# Altium PCB MergeRev3_0.PcbDoc
Units mil, origin at the board's own origin, x right, y up, seen from the top; angles counter-clockwise.
Board outline 3250 x 4600 mil, 2 copper layers (Top Layer, Bottom Layer); 11 components, 8 nets, 126 pads, 2 vias.
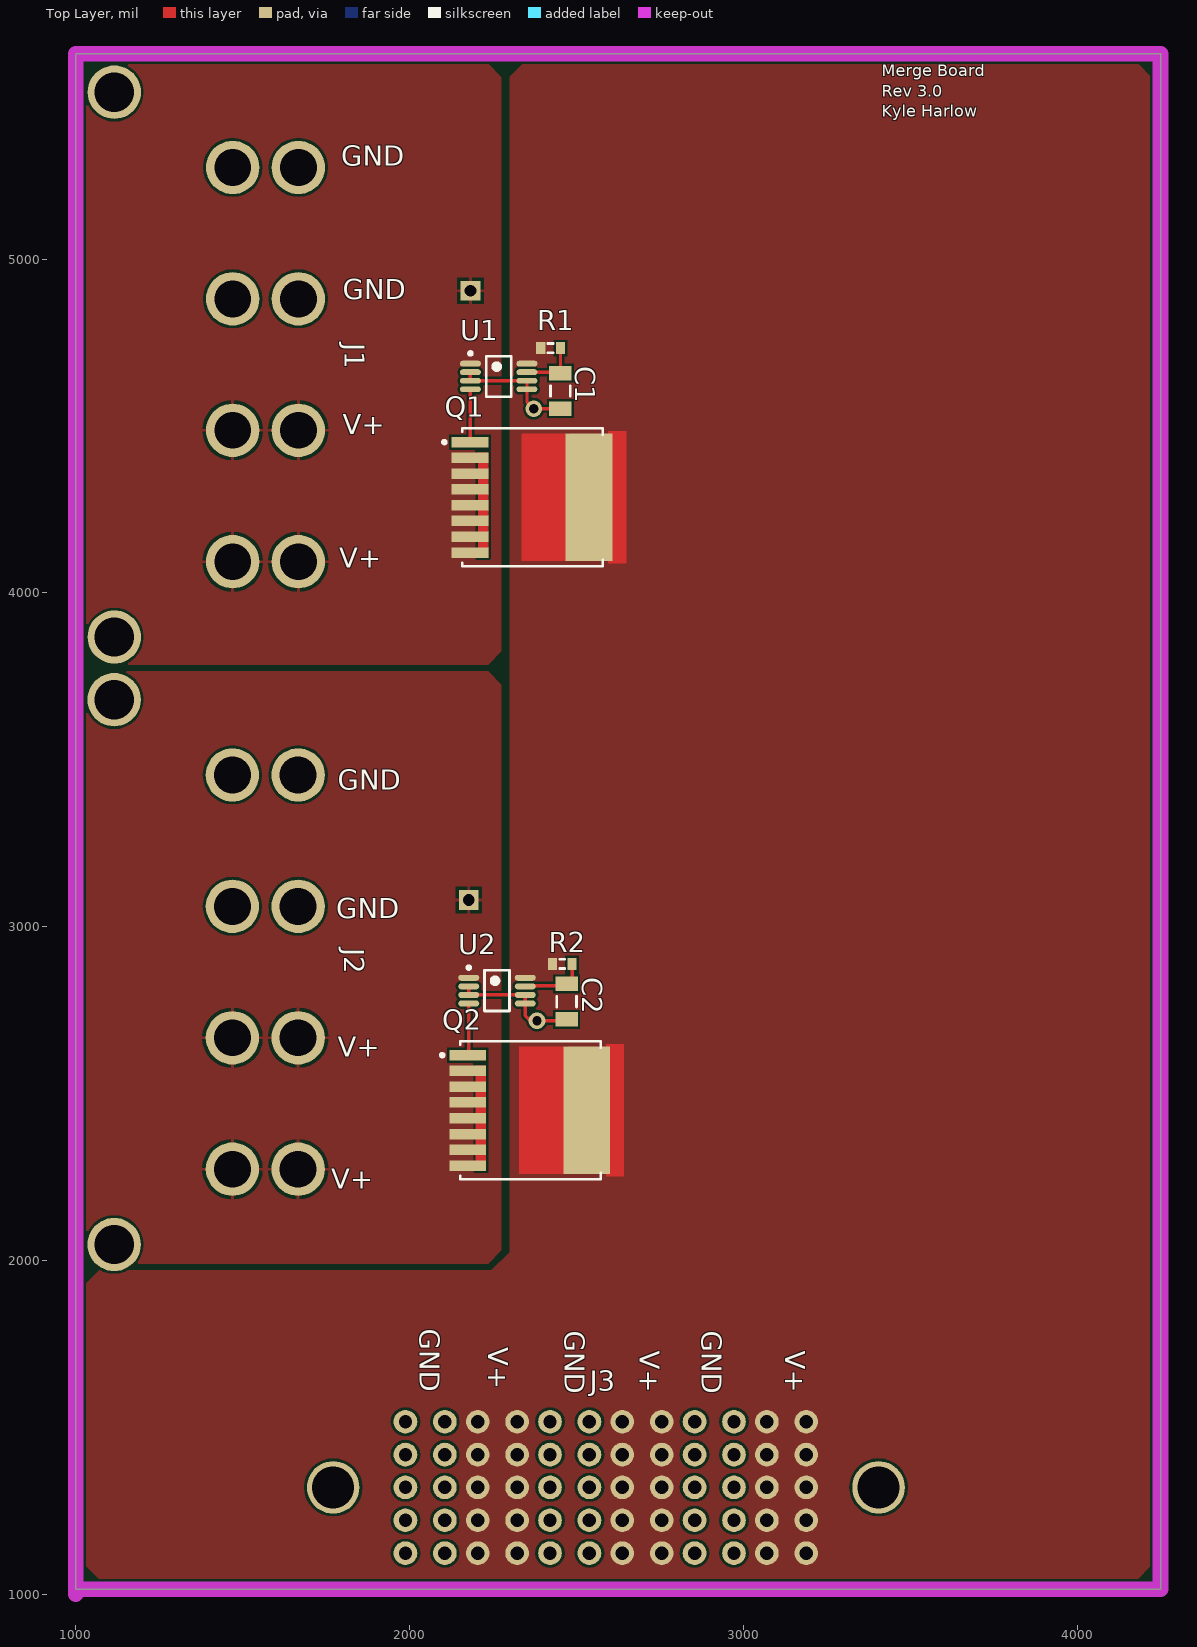
[diagram p0: Top Layer view]
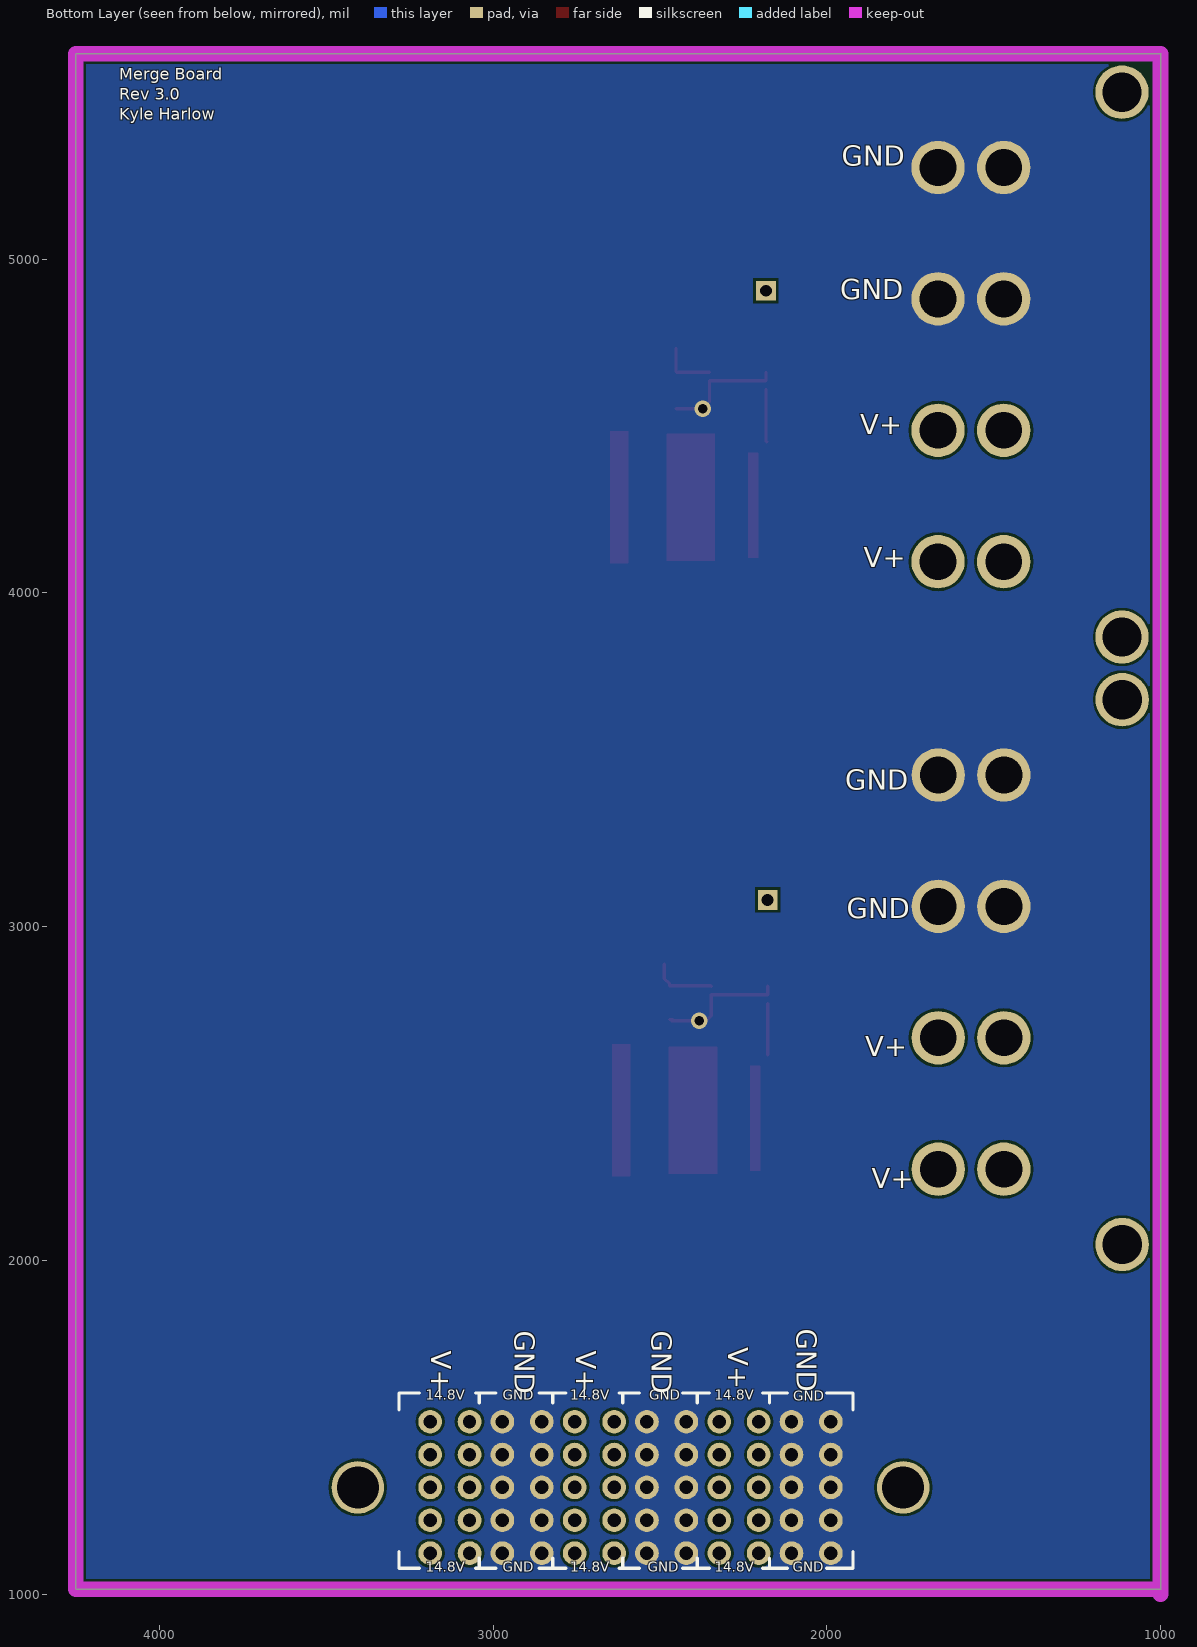
[diagram p1: Bottom Layer view, seen from below]

## Layer stack, top to bottom
Top Solder: solder mask 0.4, Solder Resist, Dk 3.5
Top Layer: signal copper 1.4
Dielectric 1: dielectric 12.6, FR-4, Dk 4.8
Bottom Layer: signal copper 1.4
Bottom Solder: solder mask 0.4, Solder Resist, Dk 3.5

## Board outline
1000,1015 4250,1015 4250,5615 1000,5615

## Design rules (kind name [scope] priority, off if disabled: settings)
Clearance [All] p1: gap=7.87 ignorepadtopadclearanceinfootprint=FALSE
PolygonConnect PolygonConnect_13 [All vs IsNamedPolygon('Top Layer-NetJ1_3')] p1: thpad.connectstyle=Relief thpad.reliefconductorwidth=10 thpad.reliefentries=4 thpad.polygonreliefangle="90 Angle" thpad.airgapwidth=10 smdpad.connectstyle=Direct smdpad.reliefconductorwidth=10 smdpad.reliefentries=4 smdpad.polygonreliefangle="90 Angle" smdpad.airgapwidth=10 via.connectstyle=Relief via.reliefconductorwidth=10 via.reliefentries=4 via.polygonreliefangle="90 Angle" via.airgapwidth=10
PolygonConnect PolygonConnect_12 [All vs IsNamedPolygon('Top Layer-NetJ2_3')] p2: thpad.connectstyle=Relief thpad.reliefconductorwidth=10 thpad.reliefentries=4 thpad.polygonreliefangle="90 Angle" thpad.airgapwidth=10 smdpad.connectstyle=Direct smdpad.reliefconductorwidth=10 smdpad.reliefentries=4 smdpad.polygonreliefangle="90 Angle" smdpad.airgapwidth=10 via.connectstyle=Relief via.reliefconductorwidth=10 via.reliefentries=4 via.polygonreliefangle="90 Angle" via.airgapwidth=10
PolygonConnect PolygonConnect_11 [All vs IsNamedPolygon('Top Layer-NetJ3_1')] p3: thpad.connectstyle=Direct thpad.reliefconductorwidth=10 thpad.reliefentries=4 thpad.polygonreliefangle="90 Angle" thpad.airgapwidth=10 smdpad.connectstyle=Direct smdpad.reliefconductorwidth=10 smdpad.reliefentries=4 smdpad.polygonreliefangle="90 Angle" smdpad.airgapwidth=10 via.connectstyle=Relief via.reliefconductorwidth=10 via.reliefentries=4 via.polygonreliefangle="90 Angle" via.airgapwidth=10
PolygonConnect PolygonConnect_10 [All vs IsNamedPolygon('Top Layer-NetJ3_1')] p4: thpad.connectstyle=Direct thpad.reliefconductorwidth=10 thpad.reliefentries=4 thpad.polygonreliefangle="90 Angle" thpad.airgapwidth=10 smdpad.connectstyle=Relief smdpad.reliefconductorwidth=10 smdpad.reliefentries=4 smdpad.polygonreliefangle="90 Angle" smdpad.airgapwidth=10 via.connectstyle=Relief via.reliefconductorwidth=10 via.reliefentries=4 via.polygonreliefangle="90 Angle" via.airgapwidth=10
PolygonConnect PolygonConnect_9 [All vs IsNamedPolygon('Top Layer-NetJ3_1')] p5: thpad.connectstyle=Direct thpad.reliefconductorwidth=10 thpad.reliefentries=4 thpad.polygonreliefangle="90 Angle" thpad.airgapwidth=10 smdpad.connectstyle=Direct smdpad.reliefconductorwidth=10 smdpad.reliefentries=4 smdpad.polygonreliefangle="90 Angle" smdpad.airgapwidth=10 via.connectstyle=Relief via.reliefconductorwidth=10 via.reliefentries=4 via.polygonreliefangle="90 Angle" via.airgapwidth=10
PolygonConnect PolygonConnect_8 [All vs IsNamedPolygon('Bottom Layer-GND')] p6: connectstyle=Direct reliefconductorwidth=10 reliefentries=4 polygonreliefangle="90 Angle" airgapwidth=10
PolygonConnect PolygonConnect_7 [All vs IsNamedPolygon('Top Layer-NetJ1_3')] p7: connectstyle=Direct reliefconductorwidth=10 reliefentries=4 polygonreliefangle="90 Angle" airgapwidth=10
PolygonConnect PolygonConnect_6 [All vs IsNamedPolygon('Top Layer-NetJ2_3')] p8: connectstyle=Direct reliefconductorwidth=10 reliefentries=4 polygonreliefangle="90 Angle" airgapwidth=10
PolygonConnect PolygonConnect_5 [All vs IsNamedPolygon('Top Layer-NetJ3_1')] p9: thpad.connectstyle=Direct thpad.reliefconductorwidth=10 thpad.reliefentries=4 thpad.polygonreliefangle="90 Angle" thpad.airgapwidth=10 smdpad.connectstyle=Direct smdpad.reliefconductorwidth=10 smdpad.reliefentries=4 smdpad.polygonreliefangle="90 Angle" smdpad.airgapwidth=10 via.connectstyle=Relief via.reliefconductorwidth=10 via.reliefentries=4 via.polygonreliefangle="90 Angle" via.airgapwidth=10
PolygonConnect PolygonConnect_4 [All vs IsNamedPolygon('Top Layer-NetJ3_1')] p10: thpad.connectstyle=Direct thpad.reliefconductorwidth=10 thpad.reliefentries=4 thpad.polygonreliefangle="90 Angle" thpad.airgapwidth=10 smdpad.connectstyle=Direct smdpad.reliefconductorwidth=10 smdpad.reliefentries=4 smdpad.polygonreliefangle="90 Angle" smdpad.airgapwidth=10 via.connectstyle=Relief via.reliefconductorwidth=10 via.reliefentries=4 via.polygonreliefangle="90 Angle" via.airgapwidth=10
PolygonConnect PolygonConnect_3 [All vs IsNamedPolygon('Top Layer-No Net 1')] p11: thpad.connectstyle=Direct thpad.reliefconductorwidth=10 thpad.reliefentries=4 thpad.polygonreliefangle="90 Angle" thpad.airgapwidth=10 smdpad.connectstyle=Direct smdpad.reliefconductorwidth=10 smdpad.reliefentries=4 smdpad.polygonreliefangle="90 Angle" smdpad.airgapwidth=10 via.connectstyle=Relief via.reliefconductorwidth=10 via.reliefentries=4 via.polygonreliefangle="90 Angle" via.airgapwidth=10
PolygonConnect PolygonConnect_2 [All vs IsNamedPolygon('Top Layer-NetJ3_1')] p12: thpad.connectstyle=Direct thpad.reliefconductorwidth=10 thpad.reliefentries=4 thpad.polygonreliefangle="90 Angle" thpad.airgapwidth=10 smdpad.connectstyle=Relief smdpad.reliefconductorwidth=40 smdpad.reliefentries=4 smdpad.polygonreliefangle="90 Angle" smdpad.airgapwidth=10 via.connectstyle=Relief via.reliefconductorwidth=10 via.reliefentries=4 via.polygonreliefangle="90 Angle" via.airgapwidth=10
PolygonConnect PolygonConnect_1 [All vs IsNamedPolygon('Top Layer-NetJ3_1')] p13: thpad.connectstyle=Relief thpad.reliefconductorwidth=40 thpad.reliefentries=4 thpad.polygonreliefangle="90 Angle" thpad.airgapwidth=10 smdpad.connectstyle=Relief smdpad.reliefconductorwidth=40 smdpad.reliefentries=4 smdpad.polygonreliefangle="90 Angle" smdpad.airgapwidth=10 via.connectstyle=Relief via.reliefconductorwidth=10 via.reliefentries=4 via.polygonreliefangle="90 Angle" via.airgapwidth=10
PolygonConnect [All] p14: connectstyle=Relief reliefconductorwidth=10 reliefentries=4 polygonreliefangle="90 Angle" airgapwidth=10
RoutingVias [All] p1: holewidth=28 width=50 viastyle="Through Hole" minholewidth=28 minwidth=50 maxholewidth=28 maxwidth=50
SolderMaskExpansion [All] p1: expansion=4
Width [All] p1: maxlimit=10 minlimit=10 preferedwidth=10
30 further rules are at their usual default settings.

## Components (designator, comment, footprint, x,y, rotation, side; value= is the part's Value field where it differs from the comment)
C1 "Cap Semi" C1206 2451.93,4605.16 r90 top value=1uF
C2 "Cap Semi" C1206 2470.63,2775.16 r90 top value=1uF
J1 "Molex42820-4224" MOLEX42820-4224 1470,5274.41 r270 top
J2 "Molex42820-4224" MOLEX42820-4224 1469.33,3454.41 r270 top
J3 "Molex 46437-1150" "MOLEX 46437-1150" 1987.68,1123.15 r0 top
Q1 "IPT004N03L" INF-PG-HSOF-8-1_V 2387.74,4286.22 r0 top
Q2 "IPT004N03L" INF-PG-HSOF-8-1_V 2381.28,2449.61 r0 top
R1 "Res3" J1-0603 2422.4,4733.31 r180 top value=100Ohm
R2 "Res3" J1-0603 2457.4,2888.31 r180 top value=100Ohm
U1 "LTC4357CMS8#PBF" LT-MS8-8_N 2266.93,4648.31 r0 top
U2 "LTC4357CMS8#PBF" LT-MS8-8_N 2261.93,2808.31 r0 top

## Footprints (in the part's own frame and the unit in brackets; to place one, negate y for a bottom-side part, rotate by r counter-clockwise, add the part's x,y. Pads: shape width x height; smd on the part's side, far side on the other; paste and mask are expansions set on the pad)
C1206 [mm]
  rect 1.1x1.7 smd: 1(-1.35,0) 2(1.35,0)
  silkscreen extent -0.4,-0.75 0.4,0.75, body extent -1.7,-0.9 1.7,0.9, height 1.3
INF-PG-HSOF-8-1_V [mm]
  rect 2.8x0.8 smd: 1(-5.249,4.2) 2(-5.249,3) 3(-5.249,1.8) 4(-5.249,0.6) 5(-5.249,-0.6) 6(-5.249,-1.8) 7(-5.249,-3) 8(-5.249,-4.2)
  rect 3.556x9.703 smd: 9(3.8,0)
  Top Layer region: -1.35,4.85 -1.35,-4.85 2.35,-4.85 2.35,4.85
  Top Layer region: 5.25,5.05 5.25,-5.05 6.65,-5.05 6.65,5.05
  Top Layer region: -4.65,3.4 -4.65,-4.6 -3.85,-4.6 -3.85,3.4
  silkscreen extent -7.32,-5.25 4.85,5.25, body extent -5.84,-4.95 5.84,4.95, height 2.4
J1-0603 [mm]
  rect 0.7x0.9 smd: 1(-0.75,0) 2(0.75,0)
  silkscreen extent -0.2,-0.35 0.2,0.35, body extent -0.85,-0.48 0.85,0.48, height 0.9
LT-MS8-8_N [mm]
  oval 1.6x0.45 smd: 1(-2.15,0.975) 2(-2.15,0.325) 3(-2.15,-0.325) 4(-2.15,-0.975) 5(2.15,-0.975) 6(2.15,-0.325) 7(2.15,0.325) 8(2.15,0.975)
  silkscreen extent -2.27,-1.55 0.95,1.87, body extent -1.55,-1.55 1.55,1.55, height 1.1
MOLEX42820-4224 [mm]
  round 4.064 hole 2.8: 1(0,5) 1(0,0) 2(10,5) 2(10,0) 3(20,0) 3(20,5) 4(30,0) 4(30,5)
  round 4.064 hole 3 unplated: ""(-5.73,-9) ""(35.73,-9)
  body extent -6.92,-22.62 36.9,5.98, height 15
"MOLEX 46437-1150" [mm]
  round 1.8 hole 1.02: 1(0,0) 1(0,2.5) 1(0,5) 1(0,7.5) 1(0,10) 1(3,0) 1(3,2.5) 1(3,5) 1(3,7.5) 1(3,10) 2(5.5,0) 2(5.5,2.5) 2(5.5,5) 2(5.5,7.5) 2(5.5,10) 2(8.5,0) 2(8.5,2.5) 2(8.5,5) 2(8.5,7.5) 2(8.5,10) 3(11,0) 3(11,2.5) 3(11,5) 3(11,7.5) 3(11,10) 3(14,0) 3(14,2.5) 3(14,5) 3(14,7.5) 3(14,10) 4(16.5,0) 4(16.5,2.5) 4(16.5,5) 4(16.5,7.5) 4(16.5,10) 4(19.5,0) 4(19.5,2.5) 4(19.5,5) 4(19.5,7.5) 4(19.5,10) 5(22,0) 5(22,2.5) 5(22,5) 5(22,7.5) 5(22,10) 5(25,0) 5(25,2.5) 5(25,5) 5(25,7.5) 5(25,10) 6(27.5,0) 6(27.5,2.5) 6(27.5,5) 6(27.5,7.5) 6(27.5,10) 6(30.5,0) 6(30.5,2.5) 6(30.5,5) 6(30.5,7.5) 6(30.5,10)
  round 4 hole 3.2 unplated: ""(-5.5,5) ""(36,5)

## Part data
C1 C2: "Capacitor (Semiconductor SIM Model)", LatestRevisionDate=29-May-2009, LatestRevisionNote="IPC-7351 Footprint Added.", PackageDescription="Chip Capacitor", PackageReference=C1206, Published=8-Jun-2000, Publisher="Altium Limited"
J1 J2: Supplier Part Number 1=0428204224-ND, ComponentLink1Description=DataSheet, ComponentLink1URL=https://www.molex.com/pdm_docs/sd/428204224_sd.pdf, Supplier 1=Digi-Key
J3: "5.50mm Pitch EXTreme Ten60Power Right Angle Plug Assembly with Guide Pins, 6 DC Power Circuits", ComponentLink1Description="Molex Website", ComponentLink1URL=https://www.molex.com/molex/products/datasheet.jsp?part=active/0464371150_PCB_HEADERS.xml
Q1 Q2: "N-Channel OptiMOS(TM) Power-MOSFET, 30 V VDS, 300 A ID, -55 to 175 degC, PG-HSOF-8, Reel, Green", Manufacturer=Infineon, Supplier Part Number 1=N/A, ComponentLink1Description="Manufacturer URL", ComponentLink1URL=http://www.infineon.com/, ComponentLink2Description=Datasheet, ComponentLink2URL=http://www.infineon.com/dgdl/IPT004N03L_rev1.2.pdf?folderId=db3a304313b8b5a60113cee8763b02d7&fileId=db3a30433e9d5d11013e9e0f382600c2, ComponentLink3Description="Package Specification", ComponentLink3URL=http://www.infineon.com/cms/packages/SMD_-_Surface_Mounted_Devices/P-PG-HSOF/P-PG-HSOF-08-1.html?__locale=en, DatasheetVersion="Rev. 1.2", Green=TRUE, Halogen-free=TRUE, ID (max)="300 A", IDpuls (max)="1,200 A", Mounting Technology="Surface Mount", PackageDescription="8-Pin Plastic (Green) Heatlink Small Outline Flat Leads Package, 10.375 x 9.9 mm Body, 0.8 mm Pitch", PackageReference=PG-HSOF-8-1, PackageVersion="Rev. 04", Packing=Reel, PartNumber=IPT004N03L, Polarity=FALSE, Ptot (max)="300 W", QG="122 nC", RDS (on) (max)="0.4 mOhm", RthJA (max)="40 K/W", RthJC (max)="0.5 K/W", Supplier 1=Mouser, Technology=OptiMOS(TM), VDS (max)="30 V", VGS(th) (max)="2.2 V", VGS(th) (min)="0.7 V"
R1 R2: "Resistor", LatestRevisionDate=29-May-2009, LatestRevisionNote="IPC-7351 Footprint Added.", PackageDescription="Chip Resistor", PackageReference=J1-0603, Published=8-Jun-2000, Publisher="Altium Limited"
U1 U2: "Positive High Voltage Ideal Diode Controller, 9 to 80 V Vin, 8-pin SOP (MS8-8), 0 to 70 degC, Pb-Free", Manufacturer="Linear Technology", Supplier Part Number 1=LTC4357CMS8#PBF-ND, ComponentLink1Description="Manufacturer URL", ComponentLink1URL=http://www.linear.com/, ComponentLink2Description=Datasheet, ComponentLink2URL=http://cds.linear.com/docs/en/datasheet/4357fd.pdf, ComponentLink3Description="Package Specification", ComponentLink3URL=http://cds.linear.com/docs/en/packaging/05081660_G_MS8.pdf, DatasheetVersion="Rev. D", Ideal Diode="Single, External, N-Channel", Mounting Technology="Surface Mount", PackageDescription="8-Pin Plastic MSOP, Body 3 x 3 mm, Pitch 0.65 mm", PackageReference=MS8-8, PackageVersion="Rev. G, 03/2012", PartNumber=LTC4357CMS8#PBF, RoHS=TRUE, Supplier 1=Digi-Key, Supplier 2=Farnell, Supplier 3=Newark, Supplier Part Number 2=1432779, Supplier Part Number 3=56M9468

## Free pads (board coordinates)
  rect 59.05x59.05 hole 35.43: 10(2177.28,3080) 10(2182.28,4905)

## Via types
v1: diameter 50, hole 28, Top Layer to Bottom Layer, 2 vias

## Nets (pads, with @x,y where several pads share a name; then routed paths per layer and width w, separated by ;. In a path a pad name is that pad's centre, name@x,y a point inside that pad or via, vN(x,y) a via of type N, cw(c..) or ccw(c..) an arc to the next point about the centre after c; other vN are vias at no path point)
GND: C1.1 C2.1 J1.1 J1.2 J2.1 J2.2 J3.1 J3.3 J3.5 U1.2 U1.3 U1.5 U1.6 U2.2 U2.3 U2.5 U2.6 | length 762.9
  Top Layer w10: U2.2 U2.3 U2.6 U2.5 2346.57,2733.66 2361.93,2718.31 v1(2381.93,2718.31) 2464.33,2718.31 2460.63,2722.01 C2.1 ; U1.2 U1.3 U1.6 U1.5 2351.57,4572.36 v1(2371.93,4552.01) C1.1
NetC1_2: C1.2 R1.1 U1.7 | length 170.9
  Top Layer w10: U1.7 2449.13,4661.1 2451.93,4663.9 R1.1
NetC2_2: C2.2 R2.1 U2.7 | length 197
  Top Layer w10: U2.7 2348.31,2822.83 2470.63,2822.83 C2.2 2486.93,2844.61 R2.1
NetJ1_3: J1.3 J1.4 pad.10@2182.28,4905 Q1.2 Q1.3 Q1.4 Q1.5 Q1.6 Q1.7 Q1.8 U1.1
NetJ2_3: J2.3 J2.4 pad.10@2177.28,3080 Q2.2 Q2.3 Q2.4 Q2.5 Q2.6 Q2.7 Q2.8 U2.1
NetJ3_2: J3.2 J3.4 J3.6 Q1.9 Q2.9 R1.2 R2.2 U1.8 U2.8
NetQ1_1: Q1.1 U1.4 | length 158.6
  Top Layer w10: Q1.1@2180,4452.24 2182.28,4454.53 U1.4
NetQ2_1: Q2.1 U2.4 | length 154.6
  Top Layer w10: Q2.1@2177.28,2615.3 U2.4
pads on no net: J1. J2. J3.

## Polygon pours and split planes (outlines as drawn)
NetJ2_3 on Top Layer "Top Layer-NetJ2_3" (solid, remove dead copper, pour order 14): 1000,1990 2235,1990 2275,2030 2275,3725 2235,3765 1085,3765 1000,3680
NetJ3_2 on Top Layer "Top Layer-NetJ3_1" (solid, remove dead copper, pour order 12): 4180,5587.14 4220,5547.14 4220,5545.77 4220,1083.38 4181.62,1045 1070,1045 1030,1085 1030,1930 1070,1970 2245,1970 2300,2025 2300,5545.77 2341.37,5587.14
NetJ1_3 on Top Layer "Top Layer-NetJ1_3" (solid, remove dead copper, pour order 16): 1000,3785 2235,3785 2275,3825 2275,5545 2232.86,5587.14 1000,5587.14
GND on Bottom Layer "Bottom Layer-GND" (solid, pour order 18): 4250,1015 4250,5615 1000,5615 1000,1015

## Keep-outs
Keep-Out Layer:
  lines w1: 1000,1990 1000,5615
  lines w47.24: 1000,1015 4250,1015 ; 1000,1015 1000,5615 ; 1000,1015 4250,1015 ; 1000,1015 1000,5615 ; 1000,5615 1000,1000 1000,5615 ; 1000,5615 4250,5615 4250,1015

## Other copper
Top Layer:
  pour cut-out: 1740,4785

## Silkscreen, mask and mechanical layers (free items; w line width, h text height)
Top Overlay:
  text "Merge Board / Rev 3.0 / Kyle Harlow" at 3415,5415 h60
  text "GND" at 1795,5280 h60
  text "GND" at 1800,4880 h60
  text "V+" at 1800,4475 h60
  text "V+" at 1790,4075 h60
  text "GND" at 1785,3410 h60
  text "GND" at 1780,3025 h60
  text "V+" at 1785,2610 h60
  text "V+" at 1765,2215 h60
  text "GND" at 2030,1795 h60 r270
  text "GND" at 2465,1790 h60 r270
  text "GND" at 2875,1790 h60 r270
  text "V+" at 2235,1740 h60 r270
  text "V+" at 2690,1730 h60 r270
  text "V+" at 3125,1730 h60 r270
Bottom Overlay:
  lines w10: 1921.5,1128 1921.5,1078 2000.35,1078 ; 1921.5,1553 1921.5,1603 2000.35,1603 ; 2118.46,1078 2191.5,1078 ; 2118.46,1603 2191.5,1603 ; 2171.5,1078 2171.5,1108 ; 2171.5,1573 2171.5,1603 ; 2351.5,1078 2431.5,1078 ; 2351.5,1603 2431.5,1603 ; 2387.72,1084.22 2387.72,1108 ; 2387.72,1573 2387.72,1596.78 ; 2561.5,1078 2621.5,1078 ; 2561.5,1603 2621.5,1603 ; 2611.5,1078 2611.5,1108 ; 2611.5,1573 2611.5,1603 ; 2781.5,1078 2861.5,1078 ; 2781.5,1603 2861.5,1603 ; 2821.5,1078 2821.5,1108 ; 2821.5,1573 2821.5,1603 ; 2991.5,1078 3051.5,1078 ; 2991.5,1603 3051.5,1603 ; 3041.5,1078 3041.5,1108 ; 3041.5,1573 3041.5,1603 ; 3221.5,1078 3281.5,1078 3281.5,1108 3281.5,1128 ; 3221.5,1603 3281.5,1603 3281.5,1573 3281.5,1553
  text "Merge Board / Rev 3.0 / Kyle Harlow" at 4120,5405 h60
  text "GND" at 1955,5280 h60
  text "GND" at 1960,4880 h60
  text "V+" at 1900,4475 h60
  text "V+" at 1890,4076.46 h60
  text "GND" at 1945,3410 h60
  text "GND" at 1940,3025 h60
  text "V+" at 1885,2611.46 h60
  text "V+" at 1865,2216.46 h60
  text "GND" at 2090,1795 h60 r90
  text "GND" at 2525,1790 h60 r90
  text "GND" at 2935,1790 h60 r90
  text "V+" at 2295,1740 h60 r90
  text "V+" at 2750,1730 h60 r90
  text "V+" at 3185,1730 h60 r90
  text "14.8V" at 2335,1583 h30
  text "GND" at 2531.5,1583 h30
  text "14.8V" at 2768.07,1583 h30
  text "GND" at 2971.5,1583 h30
  text "14.8V" at 3201.14,1583 h30
  text "GND" at 2100,1580 h30
  text "GND" at 2101.5,1068 h30
  text "14.8V" at 2335,1068 h30
  text "GND" at 2535.83,1068 h30
  text "14.8V" at 2768.07,1068 h30
  text "GND" at 2971.5,1068 h30
  text "14.8V" at 3201.14,1068 h30